# EAGLE board proto2 (EAGLE 6.6.0), part 1 of 3
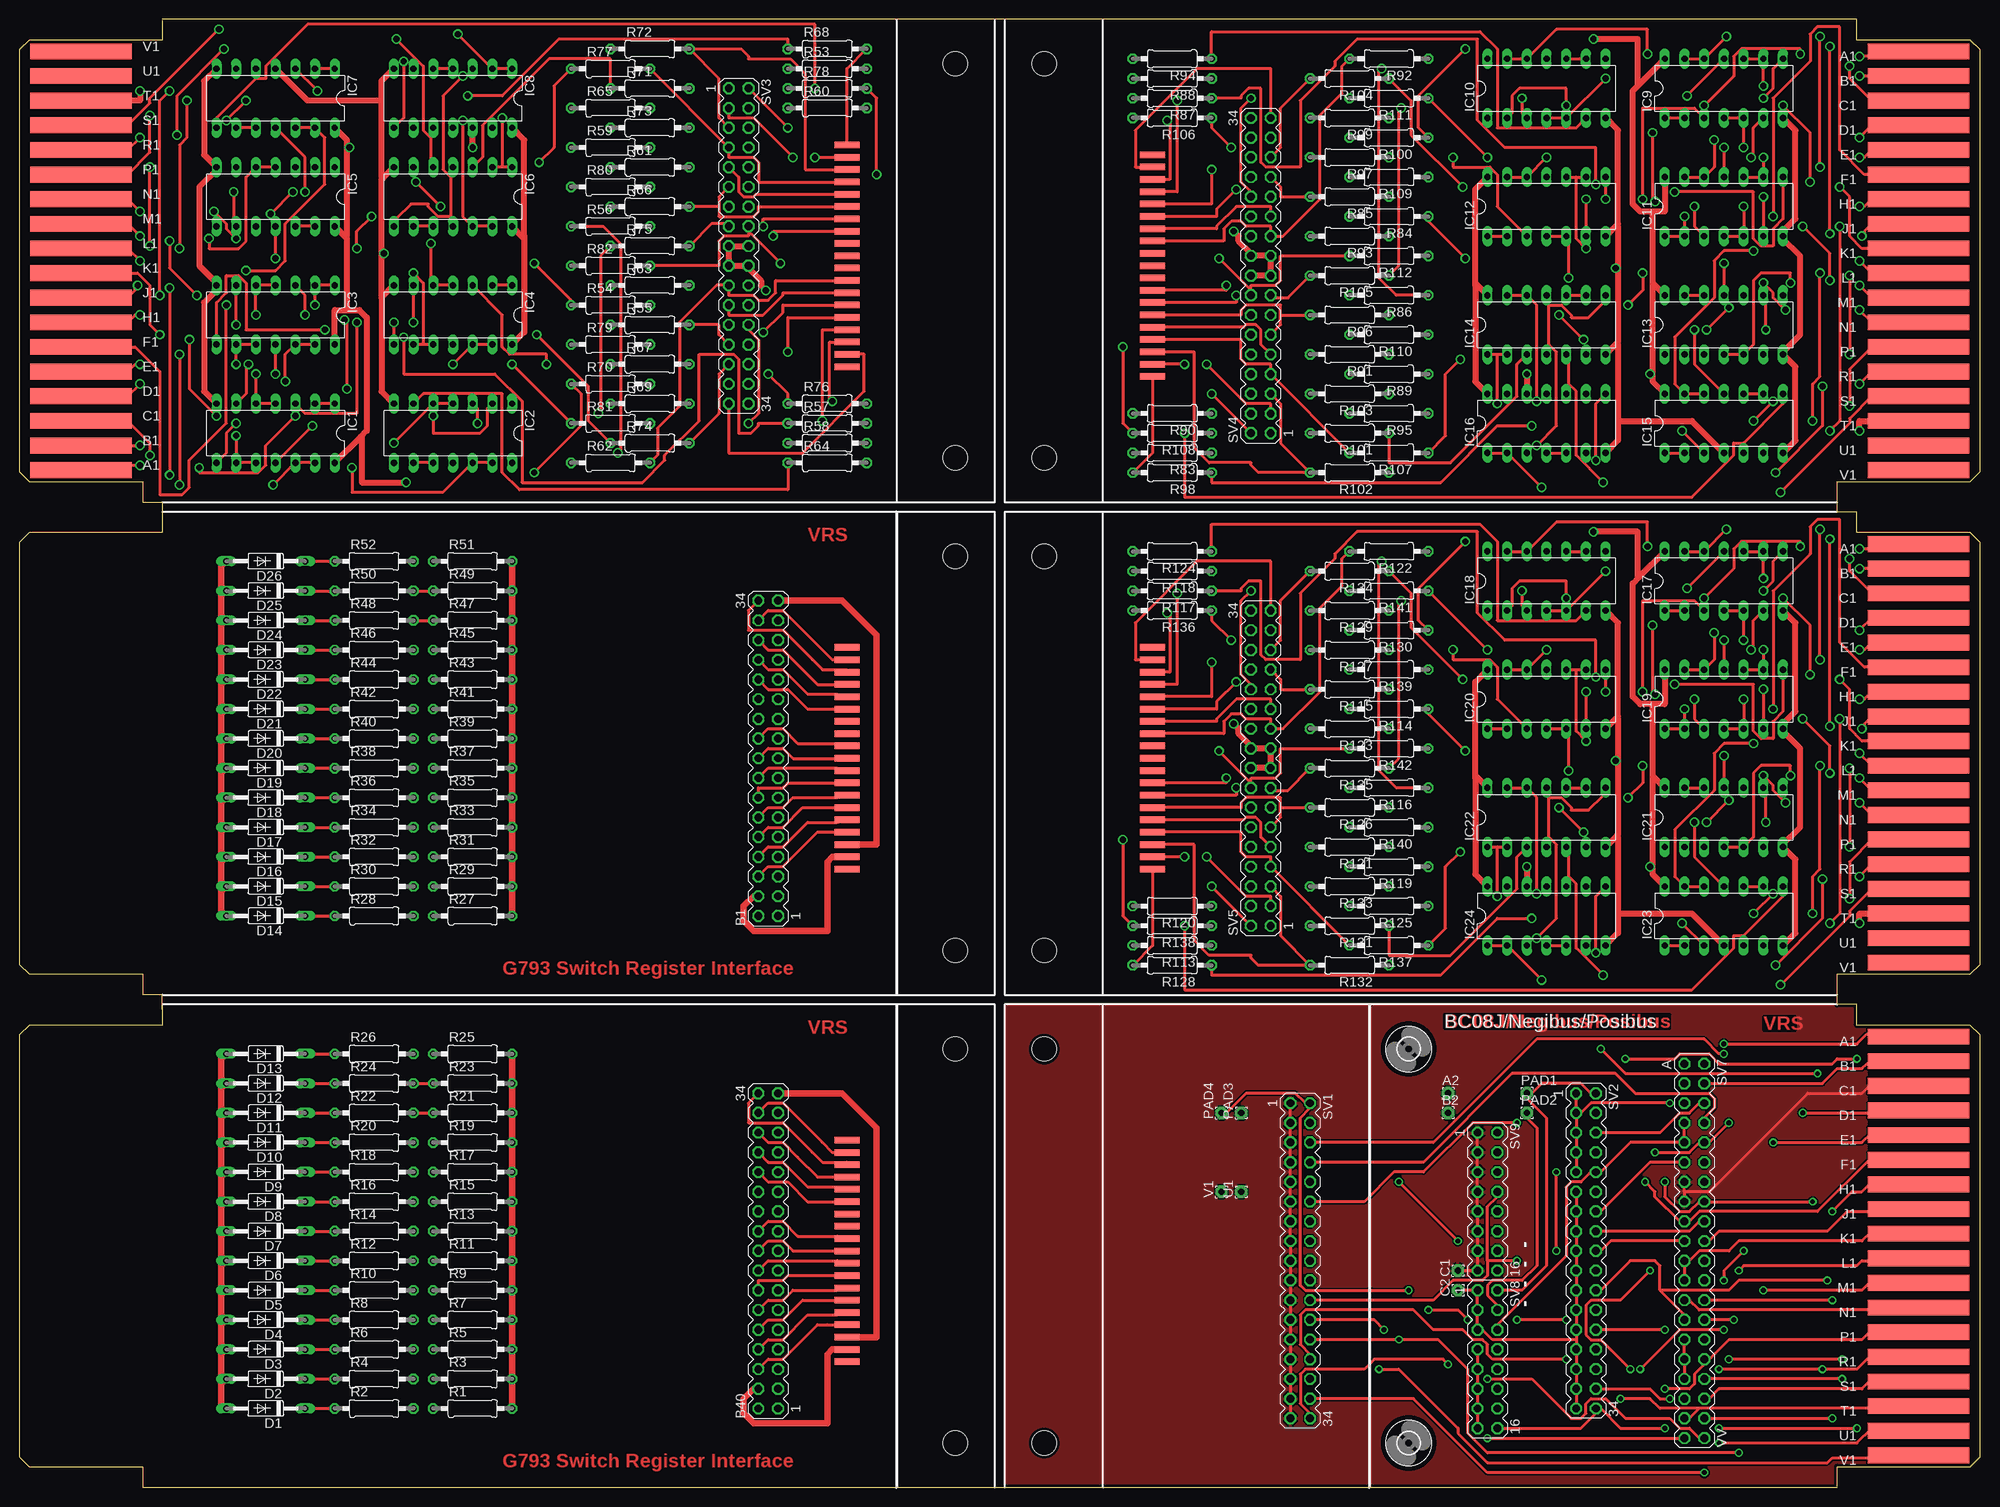
[diagram p0: board, top side]
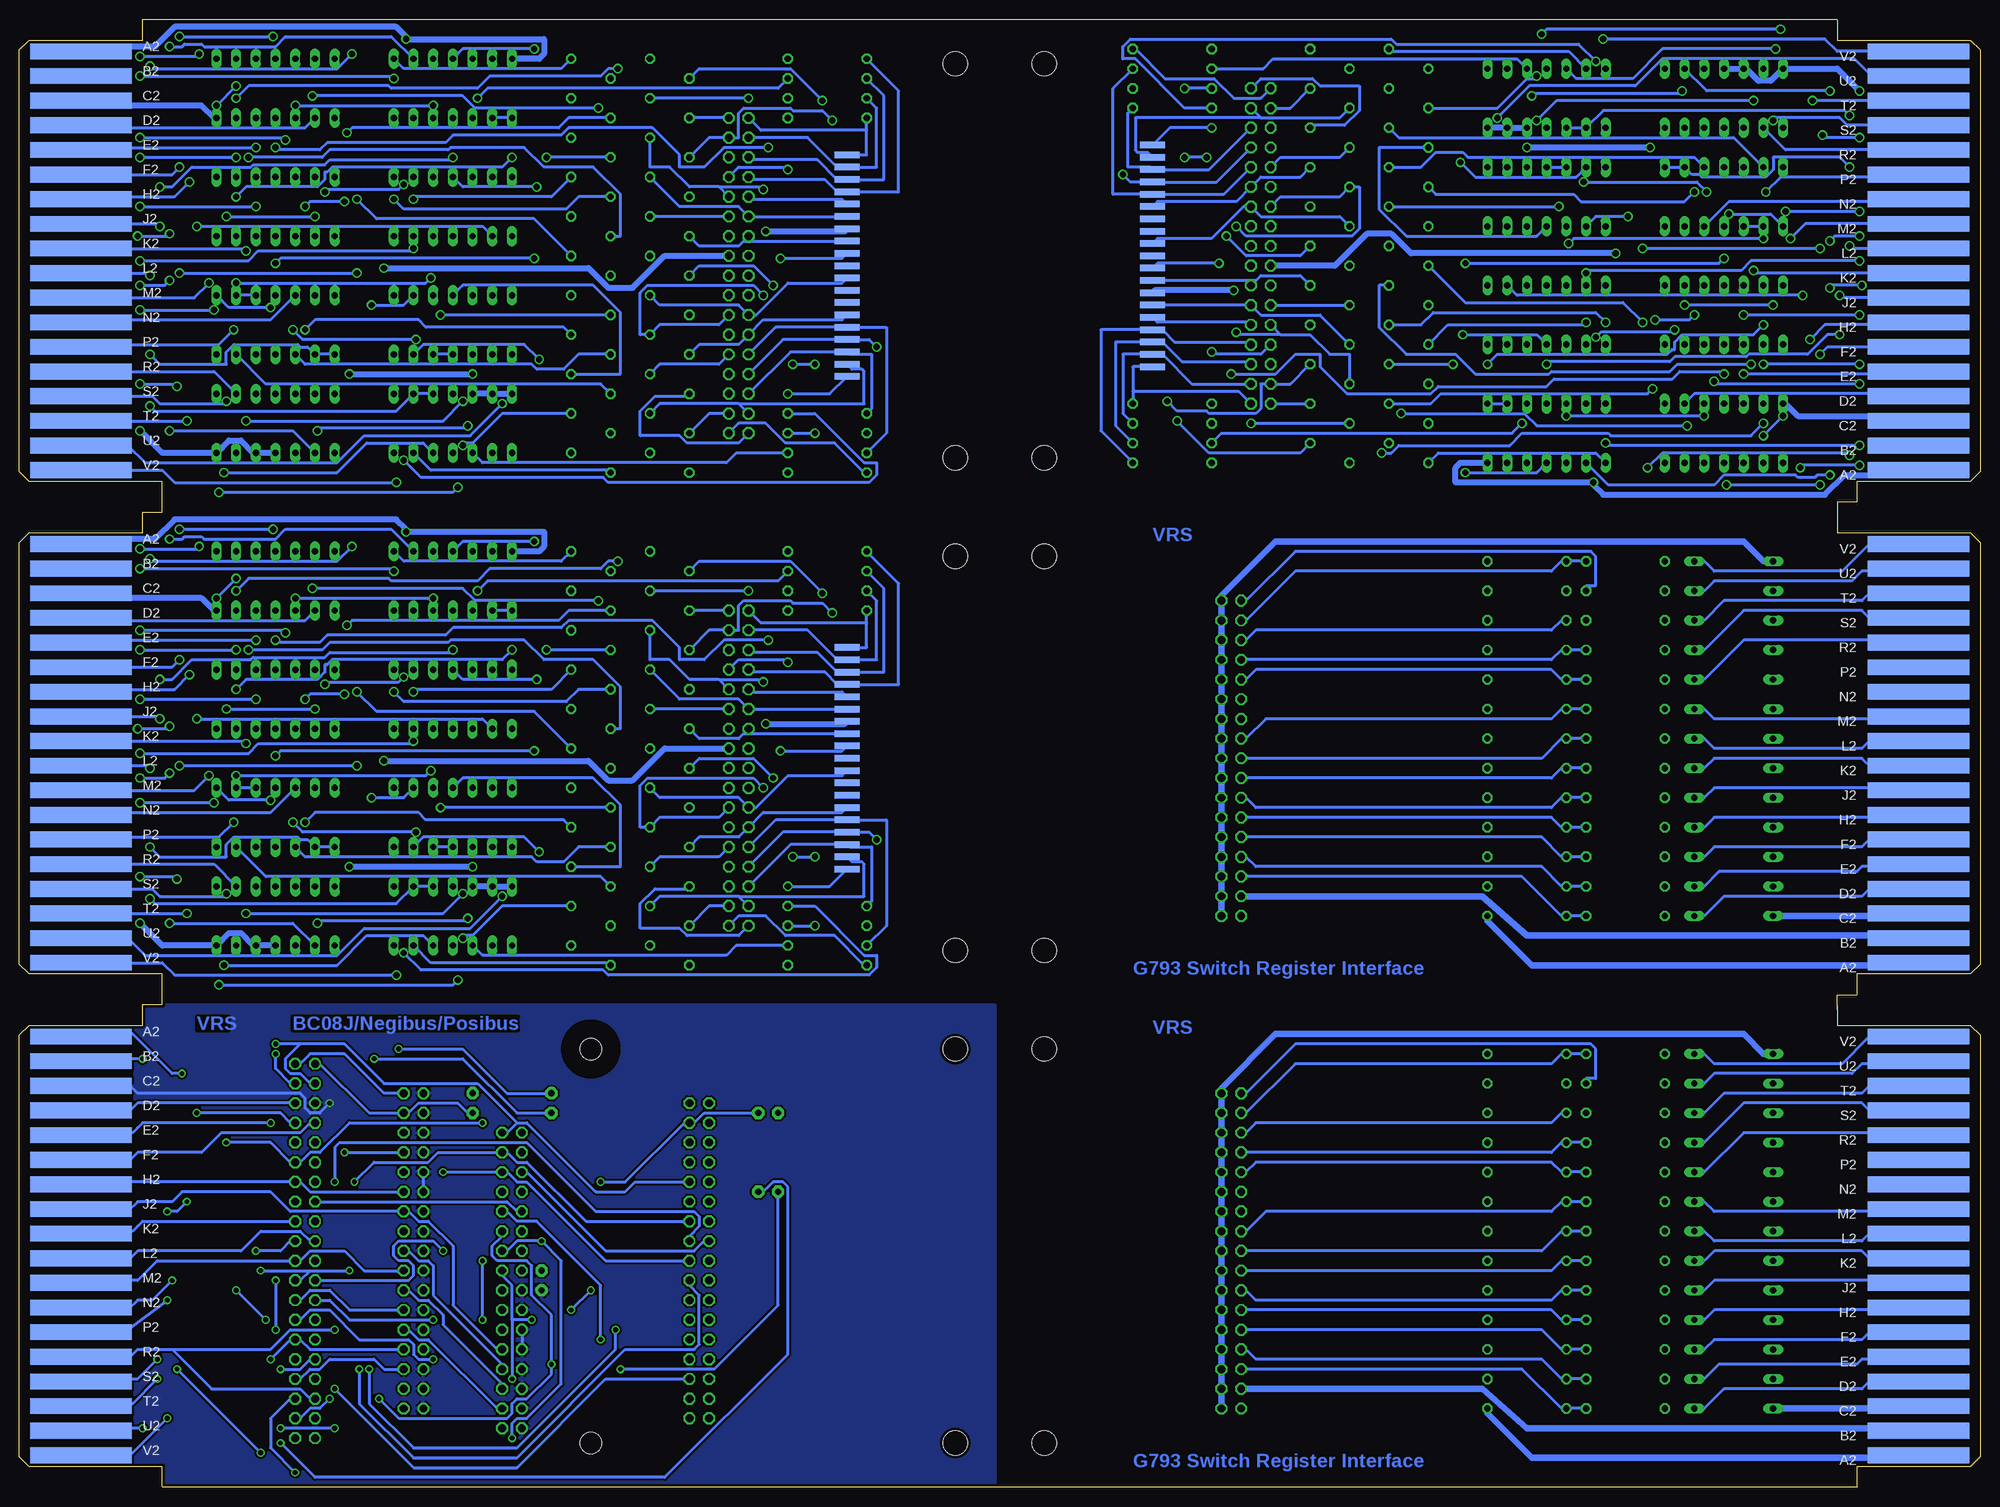
[diagram p1: board, bottom side, seen from below]

Size 252.73 x 189.23 mm. Coordinates in mm from the lower left corner, seen from the top.
Outline: 15.88,0 234.31,0
Outline: 236.85,189.23 18.41,189.23
Outline: 18.41,61.59 18.41,63.5 15.88,63.5
Outline: 15.88,127 18.41,127 18.41,125.09
Outline: 236.85,62.23 234.31,62.23 234.31,64.14
Outline: 236.85,125.73 234.31,125.73 234.31,127.64
Copper layers (1*16): Top 0.035mm / dielectric 1.5mm / Bottom 0.035mm
Design rules "custompcb *": minimum track width 10mil, minimum drill 24mil, track to track 8mil, track to pad 8mil, pad to pad 8mil, via to via 8mil, smd to smd 0mil, copper to edge 15mil, drill to drill 8mil, minimum pad ring 10mil, minimum via ring 8mil, stop-mask expansion 4mil, vias tented up to drill 0mil, thermal gap 10mil
Net classes: 1 supply: width 0.762 mm
Holes 3.17 mm at 120.65,183.51 132.08,183.51 120.65,132.72 132.08,132.72 132.08,120.02 132.08,69.22 132.08,56.52 132.08,5.71 120.65,69.22 120.65,120.02 120.65,5.71 120.65,56.52

## Footprints (pad centres in the part's own frame; a part is rotated, then mirrored left to right if it is on the bottom)
1,6/0,8 = drill 0.813 pad 1.6 octagon: 1 0,0
MA17-2 = drill 1.016 octagon: 1 -20.32,-1.27; 2 -20.32,1.27; 3 -17.78,-1.27; 4 -17.78,1.27; 5 -15.24,-1.27; 6 -15.24,1.27; 7 -12.7,-1.27; 8 -12.7,1.27; 9 -10.16,-1.27; 10 -10.16,1.27; 11 -7.62,-1.27; 12 -7.62,1.27; 13 -5.08,-1.27; 14 -5.08,1.27; 15 -2.54,-1.27; 16 -2.54,1.27; 17 0,-1.27; 18 0,1.27; 19 2.54,-1.27; 20 2.54,1.27; 21 5.08,-1.27; 22 5.08,1.27; 23 7.62,-1.27; 24 7.62,1.27; 25 10.16,-1.27; 26 10.16,1.27; 27 12.7,-1.27; 28 12.7,1.27; 29 15.24,-1.27; 30 15.24,1.27; 31 17.78,-1.27; 32 17.78,1.27; 33 20.32,-1.27; 34 20.32,1.27
FLEX19 = smd 3.175 x 0.838: 1 0,14.287; 2 0,12.7; 3 0,11.113; 4 0,9.525; 5 0,7.938; 6 0,6.35; 7 0,4.763; 8 0,3.175; 9 0,1.587; 10 0,0; 11 0,-1.587; 12 0,-3.175; 13 0,-4.763; 14 0,-6.35; 15 0,-7.938; 16 0,-9.525; 17 0,-11.113; 18 0,-12.7; 19 0,-14.287
DO35-10 = drill 0.813 long: A 5.08,0; C -5.08,0
EDGE-CON2 = smd 13.106 x 2.032: A1 7.938,4.128; B1 7.938,7.303; C1 7.938,10.477; D1 7.938,13.652; E1 7.938,16.828; F1 7.938,20.003; H1 7.938,23.177; J1 7.938,26.352; K1 7.938,29.527; L1 7.938,32.703; M1 7.938,35.877; N1 7.938,39.053; P1 7.938,42.227; R1 7.938,45.403; S1 7.938,48.578; T1 7.938,51.752; U1 7.938,54.928; V1 7.938,58.102 | smd 13.106 x 2.032 bottom: A2 7.938,4.128; B2 7.938,7.303; C2 7.938,10.477; D2 7.938,13.652; E2 7.938,16.828; F2 7.938,20.003; H2 7.938,23.177; J2 7.938,26.352; K2 7.938,29.527; L2 7.938,32.703; M2 7.938,35.877; N2 7.938,39.053; P2 7.938,42.227; R2 7.938,45.403; S2 7.938,48.578; T2 7.938,51.752; U2 7.938,54.928; V2 7.938,58.102
DIL14 = drill 0.813 long: 1 -7.62,-3.81; 2 -5.08,-3.81; 3 -2.54,-3.81; 4 0,-3.81; 5 2.54,-3.81; 6 5.08,-3.81; 7 7.62,-3.81; 8 7.62,3.81; 9 5.08,3.81; 10 2.54,3.81; 11 0,3.81; 12 -2.54,3.81; 13 -5.08,3.81; 14 -7.62,3.81
0207/10 = drill 0.813 octagon: 1 -5.08,0; 2 5.08,0
DEC40PINV = drill 1.016 octagon: A -24.13,-1.27; AA 3.81,-1.27; B -24.13,1.27; BB 3.81,1.27; C -21.59,-1.27; CC 6.35,-1.27; D -21.59,1.27; DD 6.35,1.27; E -19.05,-1.27; EE 8.89,-1.27; F -19.05,1.27; FF 8.89,1.27; H -16.51,-1.27; HH 11.43,-1.27; J -16.51,1.27; JJ 11.43,1.27; K -13.97,-1.27; KK 13.97,-1.27; L -13.97,1.27; LL 13.97,1.27; M -11.43,-1.27; MM 16.51,-1.27; N -11.43,1.27; NN 16.51,1.27; P -8.89,-1.27; PP 19.05,-1.27; R -8.89,1.27; RR 19.05,1.27; S -6.35,-1.27; SS 21.59,-1.27; T -6.35,1.27; TT 21.59,1.27; U -3.81,-1.27; UU 24.13,-1.27; V -3.81,1.27; VV 24.13,1.27; W -1.27,-1.27; X -1.27,1.27; Y 1.27,-1.27; Z 1.27,1.27
MA08-2 = drill 1.016 octagon: 1 -8.89,-1.27; 2 -8.89,1.27; 3 -6.35,-1.27; 4 -6.35,1.27; 5 -3.81,-1.27; 6 -3.81,1.27; 7 -1.27,-1.27; 8 -1.27,1.27; 9 1.27,-1.27; 10 1.27,1.27; 11 3.81,-1.27; 12 3.81,1.27; 13 6.35,-1.27; 14 6.35,1.27; 15 8.89,-1.27; 16 8.89,1.27
EDGE-CON1 = smd 13.106 x 2.032 bottom: A2 7.938,4.128; B2 7.938,7.303; C2 7.938,10.477; D2 7.938,13.652; E2 7.938,16.828; F2 7.938,20.003; H2 7.938,23.177; J2 7.938,26.352; K2 7.938,29.527; L2 7.938,32.703; M2 7.938,35.877; N2 7.938,39.053; P2 7.938,42.227; R2 7.938,45.403; S2 7.938,48.578; T2 7.938,51.752; U2 7.938,54.928; V2 7.938,58.102
2,8 = hole 2.8: 0,0

## Placement (x,y rotation side)
A2  [1,6/0,8]  184.15,50.8 0 top
B1  [MA17-2]  96.52,93.98 90 top
B2  [1,6/0,8]  184.15,48.26 0 top
B40  [MA17-2]  96.52,30.48 90 top
BOT  FLEX19  [FLEX19]  106.68,158.75 0 bottom
BOT1  FLEX19  [FLEX19]  146.05,157.48 180 bottom
BOT2  FLEX19  [FLEX19]  146.05,93.98 180 bottom
C1  [1,6/0,8]  185.42,27.94 90 top
C2  [1,6/0,8]  185.42,25.4 90 top
D1  1N3606  [DO35-10]  31.75,10.16 180 top
D2  1N3606  [DO35-10]  31.75,13.97 180 top
D3  1N3606  [DO35-10]  31.75,17.78 180 top
D4  1N3606  [DO35-10]  31.75,21.59 180 top
D5  1N3606  [DO35-10]  31.75,25.4 180 top
D6  1N3606  [DO35-10]  31.75,29.21 180 top
D7  1N3606  [DO35-10]  31.75,33.02 180 top
D8  1N3606  [DO35-10]  31.75,36.83 180 top
D9  1N3606  [DO35-10]  31.75,40.64 180 top
D10  1N3606  [DO35-10]  31.75,44.45 180 top
D11  1N3606  [DO35-10]  31.75,48.26 180 top
D12  1N3606  [DO35-10]  31.75,52.07 180 top
D13  1N3606  [DO35-10]  31.75,55.88 180 top
D14  1N3606  [DO35-10]  31.75,73.66 180 top
D15  1N3606  [DO35-10]  31.75,77.47 180 top
D16  1N3606  [DO35-10]  31.75,81.28 180 top
D17  1N3606  [DO35-10]  31.75,85.09 180 top
D18  1N3606  [DO35-10]  31.75,88.9 180 top
D19  1N3606  [DO35-10]  31.75,92.71 180 top
D20  1N3606  [DO35-10]  31.75,96.52 180 top
D21  1N3606  [DO35-10]  31.75,100.33 180 top
D22  1N3606  [DO35-10]  31.75,104.14 180 top
D23  1N3606  [DO35-10]  31.75,107.95 180 top
D24  1N3606  [DO35-10]  31.75,111.76 180 top
D25  1N3606  [DO35-10]  31.75,115.57 180 top
D26  1N3606  [DO35-10]  31.75,119.38 180 top
EDGE  [EDGE-CON2]  0,127 0 top
EDGE1  [EDGE-CON2]  252.73,189.23 180 top
EDGE2  [EDGE-CON2]  252.73,125.73 180 top
FLEX1  FLEX19  [FLEX19]  106.68,30.48 180 top
FLEX2  FLEX19  [FLEX19]  106.68,93.98 180 top
IC1  7400N  [DIL14]  33.02,135.89 180 top
IC2  7400N  [DIL14]  55.88,135.89 180 top
IC3  7400N  [DIL14]  33.02,151.13 180 top
IC4  7400N  [DIL14]  55.88,151.13 180 top
IC5  7400N  [DIL14]  33.02,166.37 180 top
IC6  7400N  [DIL14]  55.88,166.37 180 top
IC7  7400N  [DIL14]  33.02,179.07 180 top
IC8  7400N  [DIL14]  55.88,179.07 180 top
IC9  7400N  [DIL14]  219.71,180.34 0 top
IC10  7400N  [DIL14]  196.85,180.34 0 top
IC11  7400N  [DIL14]  219.71,165.1 0 top
IC12  7400N  [DIL14]  196.85,165.1 0 top
IC13  7400N  [DIL14]  219.71,149.86 0 top
IC14  7400N  [DIL14]  196.85,149.86 0 top
IC15  7400N  [DIL14]  219.71,137.16 0 top
IC16  7400N  [DIL14]  196.85,137.16 0 top
IC17  7400N  [DIL14]  219.71,116.84 0 top
IC18  7400N  [DIL14]  196.85,116.84 0 top
IC19  7400N  [DIL14]  219.71,101.6 0 top
IC20  7400N  [DIL14]  196.85,101.6 0 top
IC21  7400N  [DIL14]  219.71,86.36 0 top
IC22  7400N  [DIL14]  196.85,86.36 0 top
IC23  7400N  [DIL14]  219.71,73.66 0 top
IC24  7400N  [DIL14]  196.85,73.66 0 top
PAD1  [1,6/0,8]  194.31,50.8 0 top
PAD2  [1,6/0,8]  194.31,48.26 0 top
PAD3  [1,6/0,8]  157.48,48.26 90 top
PAD4  [1,6/0,8]  154.94,48.26 90 top
R1  1.5K  [0207/10]  58.42,10.16 0 top
R2  1.5K  [0207/10]  45.72,10.16 0 top
R3  1.5K  [0207/10]  58.42,13.97 0 top
R4  1.5K  [0207/10]  45.72,13.97 0 top
R5  1.5K  [0207/10]  58.42,17.78 0 top
R6  1.5K  [0207/10]  45.72,17.78 0 top
R7  1.5K  [0207/10]  58.42,21.59 0 top
R8  1.5K  [0207/10]  45.72,21.59 0 top
R9  1.5K  [0207/10]  58.42,25.4 0 top
R10  1.5K  [0207/10]  45.72,25.4 0 top
R11  1.5K  [0207/10]  58.42,29.21 0 top
R12  1.5K  [0207/10]  45.72,29.21 0 top
R13  1.5K  [0207/10]  58.42,33.02 0 top
R14  1.5K  [0207/10]  45.72,33.02 0 top
R15  1.5K  [0207/10]  58.42,36.83 0 top
R16  1.5K  [0207/10]  45.72,36.83 0 top
R17  1.5K  [0207/10]  58.42,40.64 0 top
R18  1.5K  [0207/10]  45.72,40.64 0 top
R19  1.5K  [0207/10]  58.42,44.45 0 top
R20  1.5K  [0207/10]  45.72,44.45 0 top
R21  1.5K  [0207/10]  58.42,48.26 0 top
R22  1.5K  [0207/10]  45.72,48.26 0 top
R23  1.5K  [0207/10]  58.42,52.07 0 top
R24  1.5K  [0207/10]  45.72,52.07 0 top
R25  1.5K  [0207/10]  58.42,55.88 0 top
R26  1.5K  [0207/10]  45.72,55.88 0 top
R27  1.5K  [0207/10]  58.42,73.66 0 top
R28  1.5K  [0207/10]  45.72,73.66 0 top
R29  1.5K  [0207/10]  58.42,77.47 0 top
R30  1.5K  [0207/10]  45.72,77.47 0 top
R31  1.5K  [0207/10]  58.42,81.28 0 top
R32  1.5K  [0207/10]  45.72,81.28 0 top
R33  1.5K  [0207/10]  58.42,85.09 0 top
R34  1.5K  [0207/10]  45.72,85.09 0 top
R35  1.5K  [0207/10]  58.42,88.9 0 top
R36  1.5K  [0207/10]  45.72,88.9 0 top
R37  1.5K  [0207/10]  58.42,92.71 0 top
R38  1.5K  [0207/10]  45.72,92.71 0 top
R39  1.5K  [0207/10]  58.42,96.52 0 top
R40  1.5K  [0207/10]  45.72,96.52 0 top
R41  1.5K  [0207/10]  58.42,100.33 0 top
R42  1.5K  [0207/10]  45.72,100.33 0 top
R43  1.5K  [0207/10]  58.42,104.14 0 top
R44  1.5K  [0207/10]  45.72,104.14 0 top
R45  1.5K  [0207/10]  58.42,107.95 0 top
R46  1.5K  [0207/10]  45.72,107.95 0 top
R47  1.5K  [0207/10]  58.42,111.76 0 top
R48  1.5K  [0207/10]  45.72,111.76 0 top
R49  1.5K  [0207/10]  58.42,115.57 0 top
R50  1.5K  [0207/10]  45.72,115.57 0 top
R51  1.5K  [0207/10]  58.42,119.38 0 top
R52  1.5K  [0207/10]  45.72,119.38 0 top
R53  470  [0207/10]  104.14,182.88 0 top
R54  470  [0207/10]  76.2,152.4 0 top
R55  470  [0207/10]  81.28,149.86 0 top
R56  470  [0207/10]  76.2,162.56 0 top
R57  470  [0207/10]  104.14,137.16 0 top
R58  470  [0207/10]  104.14,134.62 0 top
R59  470  [0207/10]  76.2,172.72 0 top
R60  470  [0207/10]  104.14,177.8 0 top
R61  470  [0207/10]  81.28,170.18 0 top
R62  470  [0207/10]  76.2,132.08 0 top
R63  470  [0207/10]  81.28,154.94 0 top
R64  470  [0207/10]  104.14,132.08 0 top
R65  470  [0207/10]  76.2,177.8 0 top
R66  470  [0207/10]  81.28,165.1 0 top
R67  470  [0207/10]  81.28,144.78 0 top
R68  470  [0207/10]  104.14,185.42 0 top
R69  470  [0207/10]  81.28,139.7 0 top
R70  470  [0207/10]  76.2,142.24 0 top
R71  470  [0207/10]  81.28,180.34 0 top
R72  470  [0207/10]  81.28,185.42 0 top
R73  470  [0207/10]  81.28,175.26 0 top
R74  470  [0207/10]  81.28,134.62 0 top
R75  470  [0207/10]  81.28,160.02 0 top
R76  470  [0207/10]  104.14,139.7 0 top
R77  470  [0207/10]  76.2,182.88 0 top
R78  470  [0207/10]  104.14,180.34 0 top
R79  470  [0207/10]  76.2,147.32 0 top
R80  470  [0207/10]  76.2,167.64 0 top
R81  470  [0207/10]  76.2,137.16 0 top
R82  470  [0207/10]  76.2,157.48 0 top
R83  470  [0207/10]  148.59,133.35 180 top
R84  470  [0207/10]  176.53,163.83 180 top
R85  470  [0207/10]  171.45,166.37 180 top
R86  470  [0207/10]  176.53,153.67 180 top
R87  470  [0207/10]  148.59,179.07 180 top
R88  470  [0207/10]  148.59,181.61 180 top
R89  470  [0207/10]  176.53,143.51 180 top
R90  470  [0207/10]  148.59,138.43 180 top
R91  470  [0207/10]  171.45,146.05 180 top
R92  470  [0207/10]  176.53,184.15 180 top
R93  470  [0207/10]  171.45,161.29 180 top
R94  470  [0207/10]  148.59,184.15 180 top
R95  470  [0207/10]  176.53,138.43 180 top
R96  470  [0207/10]  171.45,151.13 180 top
R97  470  [0207/10]  171.45,171.45 180 top
R98  470  [0207/10]  148.59,130.81 180 top
R99  470  [0207/10]  171.45,176.53 180 top
R100  470  [0207/10]  176.53,173.99 180 top
R101  470  [0207/10]  171.45,135.89 180 top
R102  470  [0207/10]  171.45,130.81 180 top
R103  470  [0207/10]  171.45,140.97 180 top
R104  470  [0207/10]  171.45,181.61 180 top
R105  470  [0207/10]  171.45,156.21 180 top
R106  470  [0207/10]  148.59,176.53 180 top
R107  470  [0207/10]  176.53,133.35 180 top
R108  470  [0207/10]  148.59,135.89 180 top
R109  470  [0207/10]  176.53,168.91 180 top
R110  470  [0207/10]  176.53,148.59 180 top
R111  470  [0207/10]  176.53,179.07 180 top
R112  470  [0207/10]  176.53,158.75 180 top
R113  470  [0207/10]  148.59,69.85 180 top
R114  470  [0207/10]  176.53,100.33 180 top
R115  470  [0207/10]  171.45,102.87 180 top
R116  470  [0207/10]  176.53,90.17 180 top
R117  470  [0207/10]  148.59,115.57 180 top
R118  470  [0207/10]  148.59,118.11 180 top
R119  470  [0207/10]  176.53,80.01 180 top
R120  470  [0207/10]  148.59,74.93 180 top
R121  470  [0207/10]  171.45,82.55 180 top
R122  470  [0207/10]  176.53,120.65 180 top
R123  470  [0207/10]  171.45,97.79 180 top
R124  470  [0207/10]  148.59,120.65 180 top
R125  470  [0207/10]  176.53,74.93 180 top
R126  470  [0207/10]  171.45,87.63 180 top
R127  470  [0207/10]  171.45,107.95 180 top
R128  470  [0207/10]  148.59,67.31 180 top
R129  470  [0207/10]  171.45,113.03 180 top
R130  470  [0207/10]  176.53,110.49 180 top
R131  470  [0207/10]  171.45,72.39 180 top
R132  470  [0207/10]  171.45,67.31 180 top
R133  470  [0207/10]  171.45,77.47 180 top
R134  470  [0207/10]  171.45,118.11 180 top
R135  470  [0207/10]  171.45,92.71 180 top
R136  470  [0207/10]  148.59,113.03 180 top
R137  470  [0207/10]  176.53,69.85 180 top
R138  470  [0207/10]  148.59,72.39 180 top
R139  470  [0207/10]  176.53,105.41 180 top
R140  470  [0207/10]  176.53,85.09 180 top
R141  470  [0207/10]  176.53,115.57 180 top
R142  470  [0207/10]  176.53,95.25 180 top
SV1  [MA17-2]  165.1,29.21 270 top
SV2  [MA17-2]  201.93,30.48 270 top
SV3  [MA17-2]  92.71,160.02 270 top
SV4  [MA17-2]  160.02,156.21 90 top
SV5  [MA17-2]  160.02,92.71 90 top
SV7  [DEC40PINV]  215.9,30.48 270 top
SV8  [MA08-2]  189.23,16.51 270 top
SV9  [MA08-2]  189.23,36.83 270 top
TOP  FLEX19  [FLEX19]  106.68,158.75 0 top
TOP1  FLEX19  [FLEX19]  146.05,157.48 180 top
TOP2  FLEX19  [FLEX19]  146.05,93.98 180 top
U1  [1,6/0,8]  157.48,38.1 90 top
U$2  EDGE-1  [EDGE-CON1]  0,0 0 top
U$7  EDGE-1  [EDGE-CON1]  0,63.5 0 top
U$9  [EDGE-CON2]  252.73,62.23 180 top
U$11  [2,8]  179.07,56.52 0 top
U$12  [2,8]  179.07,5.71 0 top
V1  [1,6/0,8]  154.94,38.1 90 top

## Library data of the parts
A2 B2 C1 C2 PAD1-PAD4 U1 V1 = wirepad
B1 B40 SV3-SV5 = con-lstb; OC_FARNELL: unknown; OC_NEWARK: unknown
BOT BOT1 BOT2 EDGE EDGE1 EDGE2 FLEX1 FLEX2 SV7 TOP TOP1 TOP2 U$2 U$7 U$9 = dec-con
D1-D26 = diode
IC1-IC24 = 74xx-us
R1-R142 = rcl
SV1 SV2 SV8 SV9 = con-lstb
U$11 U$12 = holes

## Nets
-15V [supply]: B40.4 FLEX1.2 U$2.B2
-15V1 [supply]: B1.4 FLEX2.2 U$7.B2
-15V2: B2.1 U$9.B2
A1: SV1.10 SV7.C SV9.2 U$9.A1
B1: SV1.6 SV7.D U$9.B1
BOT1: BOT.1 R73.2 SV3.2
BOT2: BOT.2 R65.2 SV3.4
BOT3: BOT.3 R60.2 SV3.6
BOT4: BOT.4 R78.2 SV3.8
BOT5: BOT.5 R53.2 SV3.10
BOT6: BOT.6 R61.2 SV3.12
BOT7: BOT1.15 R111.2 SV4.26
BOT8: BOT1.3 R90.2 SV4.6
BOT9: BOT.9 R56.2 SV3.14
BOT10: BOT1.1 R103.2 SV4.2
BOT11: BOT.11 R82.2 SV3.16
BOT12: BOT.12 R63.2 SV3.22
BOT13: BOT1.2 R95.2 SV4.4
BOT14: BOT.14 R79.2 SV3.24
BOT15: BOT.15 R81.2 SV3.26
BOT16: BOT.16 R64.2 SV3.28
BOT17: BOT.17 R58.2 SV3.30
BOT18: BOT.18 R57.2 SV3.32
BOT19: BOT.19 R76.2 SV3.34
BOT20: BOT1.4 R108.2 SV4.8
BOT21: BOT1.5 R83.2 SV4.10
BOT22: BOT1.19 R106.2 SV4.34
BOT23: BOT1.18 R87.2 SV4.32
BOT24: BOT1.17 R88.2 SV4.30
BOT25: BOT1.16 R94.2 SV4.28
BOT26: BOT1.14 R109.2 SV4.24
BOT27: BOT1.12 R93.2 SV4.22
BOT28: BOT1.11 R112.2 SV4.16
BOT29: BOT1.9 R86.2 SV4.14
BOT30: BOT1.6 R91.2 SV4.12
BOT31: BOT2.15 R141.2 SV5.26
BOT32: BOT2.3 R120.2 SV5.6
BOT33: BOT2.1 R133.2 SV5.2
BOT34: BOT2.2 R125.2 SV5.4
BOT35: BOT2.4 R138.2 SV5.8
BOT36: BOT2.5 R113.2 SV5.10
BOT37: BOT2.19 R136.2 SV5.34
BOT38: BOT2.18 R117.2 SV5.32
BOT39: BOT2.17 R118.2 SV5.30
BOT40: BOT2.16 R124.2 SV5.28
BOT41: BOT2.14 R139.2 SV5.24
BOT42: BOT2.12 R123.2 SV5.22
BOT43: BOT2.11 R142.2 SV5.16
BOT44: BOT2.9 R116.2 SV5.14
BOT45: BOT2.6 R121.2 SV5.12
C1: C1.1 SV1.1 SV1.3 SV1.5 SV1.7 SV1.9 SV1.11 SV1.13 SV1.15 SV1.17 SV1.19 SV1.21 SV1.23 SV1.25 SV1.27 SV1.29 SV1.31 SV1.33 SV7.P SV7.S SV9.1 SV9.3 SV9.5 SV9.7 SV9.9 SV9.11 SV9.13 SV9.15 U$9.C1
C2: C2.1 SV2.1 SV2.3 SV2.5 SV2.7 SV2.9 SV2.11 SV2.13 SV2.15 SV2.17 SV2.19 SV2.21 SV2.23 SV2.25 SV2.27 SV2.29 SV2.31 SV2.33 SV7.E SV8.1 SV8.3 SV8.5 SV8.7 SV8.9 SV8.11 SV8.13 SV8.15 U$9.C2
D1: D14.C R28.1 U$7.D2
D2: D1.C R2.1 U$2.D2
D3: SV2.6 SV7.F U$9.D2
D4: SV1.8 SV7.J U$9.D1
E1: D15.C R30.1 U$7.E2
E2: D2.C R4.1 U$2.E2
E3: SV2.8 SV7.L U$9.E2
E4: SV1.12 SV7.N U$9.E1
F1: D16.C R32.1 U$7.F2
F2: D3.C R6.1 U$2.F2
F3: SV2.10 SV7.H SV7.K SV8.6 U$9.F2
F4: SV1.14 SV7.U SV9.4 U$9.F1
GND2 [supply]: BOT.13 EDGE.C2 EDGE.T1 IC1.7 IC2.7 IC3.7 IC4.7 IC5.7 IC6.7 IC7.4 IC7.5 IC7.7 IC8.7 SV3.17 SV3.18 SV3.19 SV3.20
GND3 [supply]: BOT1.13 EDGE1.C2 EDGE1.T1 IC9.7 IC10.7 IC11.7 IC12.7 IC13.7 IC14.7 IC15.4 IC15.5 IC15.7 IC16.7 SV4.17 SV4.18 SV4.19 SV4.20
GND4 [supply]: BOT2.13 EDGE2.C2 EDGE2.T1 IC17.7 IC18.7 IC19.7 IC20.7 IC21.7 IC22.7 IC23.4 IC23.5 IC23.7 IC24.7 SV5.17 SV5.18 SV5.19 SV5.20
GND5 [supply]: B40.1 B40.3 B40.5 B40.7 B40.9 B40.11 B40.13 B40.15 B40.17 B40.19 B40.21 B40.23 B40.25 B40.27 B40.29 B40.31 B40.33 D1.A D2.A D3.A D4.A D5.A D6.A D7.A D8.A D9.A D10.A D11.A D12.A D13.A FLEX1.3 U$2.C2
GND6 [supply]: B1.1 B1.3 B1.5 B1.7 B1.9 B1.11 B1.13 B1.15 B1.17 B1.19 B1.21 B1.23 B1.25 B1.27 B1.29 B1.31 B1.33 D14.A D15.A D16.A D17.A D18.A D19.A D20.A D21.A D22.A D23.A D24.A D25.A D26.A FLEX2.3 U$7.C2
H1: D17.C R34.1 U$7.H2
H2: D4.C R8.1 U$2.H2
H3: SV2.12 SV7.R U$9.H2
H4: SV1.16 SV7.T U$9.H1
J1: D18.C R36.1 U$7.J2
J2: D5.C R10.1 U$2.J2
J3: SV1.20 SV7.X U$9.J1
J4: SV2.14 SV7.M SV8.8 U$9.J2
JA2: PAD1.1 SV2.2 SV7.B SV8.2
JB2: PAD2.1 SV2.4 SV7.A SV8.4
JU1: PAD3.1 SV1.4 SV7.UU SV9.14
JV1: PAD4.1 SV1.2 SV7.VV SV9.16
K1: D19.C R38.1 U$7.K2
K2: D6.C R12.1 U$2.K2
K3: SV2.16 SV7.V U$9.K2
K4: SV1.18 SV7.AA SV7.Y SV9.6 U$9.K1
L1: D20.C R40.1 U$7.L2
L2: D7.C R14.1 U$2.L2
L3: SV1.24 SV7.BB U$9.L1
L4: SV2.18 SV7.W SV8.10 U$9.L2
M1: D21.C R42.1 U$7.M2
M2: D8.C R16.1 U$2.M2
M3: SV2.20 SV7.Z U$9.M2
M4: SV1.28 SV7.FF U$9.M1
N1: SV1.22 SV7.CC SV9.8 U$9.N1
N2: SV2.22 SV7.EE SV8.12 U$9.N2
N$1: EDGE.A1 IC2.1 IC2.2
N$2: IC2.3 R58.1
N$3: IC3.8 R57.1
N$4: IC1.8 R56.1
N$5: IC4.8 R55.1
N$6: IC5.11 R54.1
N$7: EDGE.H2 IC1.9 IC1.10
N$8: EDGE.S1 IC8.1 IC8.2
N$9: EDGE.N2 IC5.12 IC5.13
N$10: EDGE.L1 IC4.9 IC4.10
N$11: EDGE.E1 IC3.9 IC3.10
N$12: EDGE.P1 IC8.9 IC8.10
N$13: EDGE.B1 IC2.4 IC2.5
N$14: EDGE.E2 IC1.4 IC1.5
N$15: EDGE.J1 IC2.9 IC2.10
N$16: EDGE.L2 IC5.1 IC5.2
N$17: EDGE.S2 IC6.12 IC6.13
N$18: IC8.8 R60.1
N$19: IC5.3 R61.1
N$20: IC2.8 R62.1
N$21: IC1.6 R63.1
N$22: IC2.6 R64.1
N$23: IC6.11 R59.1
N$24: IC8.3 R53.1
N$25: EDGE.P2 IC5.9 IC5.10
N$26: EDGE.C1 IC2.12 IC2.13
N$27: EDGE.F1 IC3.1 IC3.2
N$28: EDGE.J2 IC7.1 IC7.2
N$29: EDGE.M1 IC4.1 IC4.2
N$30: EDGE.T2 IC6.9 IC6.10
N$31: IC6.8 R65.1
N$32: IC5.8 R66.1
N$33: IC4.3 R67.1
N$34: IC7.3 R68.1
N$35: IC2.11 R70.1
N$36: IC3.3 R69.1
N$37: IC6.3 R71.1
N$38: IC8.6 R72.1
N$39: IC5.6 R73.1
N$40: IC4.11 R74.1
N$41: IC1.11 R75.1
N$42: IC3.11 R76.1
N$43: EDGE.R1 IC8.4 IC8.5
N$44: EDGE.F2 IC1.12 IC1.13
N$45: EDGE.K1 IC4.12 IC4.13
N$46: EDGE.M2 IC5.4 IC5.5
N$47: EDGE.U2 IC6.1 IC6.2
N$48: EDGE.R2 IC7.9 IC7.10
N$49: EDGE.D1 IC3.12 IC3.13
N$50: EDGE.D2 IC1.1 IC1.2
N$51: EDGE.H1 IC3.4 IC3.5
N$52: EDGE.K2 IC7.12 IC7.13
N$53: EDGE.N1 IC4.4 IC4.5
N$54: EDGE.V2 IC6.4 IC6.5
N$55: IC6.6 R77.1
N$56: IC7.8 R78.1
N$57: IC4.6 R79.1
N$58: IC7.11 R80.1
N$59: IC3.6 R81.1
N$60: IC1.3 R82.1
N$61: EDGE1.A1 IC10.1 IC10.2
N$62: IC10.3 R88.1
N$63: IC11.8 R87.1
N$64: IC9.8 R86.1
N$65: IC12.8 R85.1
N$66: IC13.11 R84.1
N$67: EDGE1.H2 IC9.9 IC9.10
N$68: EDGE1.S1 IC16.1 IC16.2
N$69: EDGE1.N2 IC13.12 IC13.13
N$70: EDGE1.L1 IC12.9 IC12.10
N$71: EDGE1.E1 IC11.9 IC11.10
N$72: EDGE1.P1 IC16.9 IC16.10
N$73: EDGE1.B1 IC10.4 IC10.5
N$74: EDGE1.E2 IC9.4 IC9.5
N$75: EDGE1.J1 IC10.9 IC10.10
N$76: EDGE1.L2 IC13.1 IC13.2
N$77: EDGE1.S2 IC14.12 IC14.13
N$78: IC16.8 R90.1
N$79: IC13.3 R91.1
N$80: IC10.8 R92.1
N$81: IC9.6 R93.1
N$82: IC10.6 R94.1
N$83: IC14.11 R89.1
N$84: IC16.3 R83.1
N$85: EDGE1.P2 IC13.9 IC13.10
N$86: EDGE1.C1 IC10.12 IC10.13
N$87: EDGE1.F1 IC11.1 IC11.2
N$88: EDGE1.J2 IC15.1 IC15.2
N$89: EDGE1.M1 IC12.1 IC12.2
N$90: EDGE1.T2 IC14.9 IC14.10
N$91: IC14.8 R95.1
N$92: IC13.8 R96.1
N$93: IC12.3 R97.1
N$94: IC15.3 R98.1
N$95: IC10.11 R100.1
N$96: IC11.3 R99.1
N$97: IC14.3 R101.1
N$98: IC16.6 R102.1
N$99: IC13.6 R103.1
N$100: IC12.11 R104.1
N$101: IC9.11 R105.1
N$102: IC11.11 R106.1
N$103: EDGE1.R1 IC16.4 IC16.5
N$104: EDGE1.F2 IC9.12 IC9.13
N$105: EDGE1.K1 IC12.12 IC12.13
N$106: EDGE1.M2 IC13.4 IC13.5
N$107: EDGE1.U2 IC14.1 IC14.2
N$108: EDGE1.R2 IC15.9 IC15.10
N$109: EDGE1.D1 IC11.12 IC11.13
N$110: EDGE1.D2 IC9.1 IC9.2
N$111: EDGE1.H1 IC11.4 IC11.5
N$112: EDGE1.K2 IC15.12 IC15.13
N$113: EDGE1.N1 IC12.4 IC12.5
N$114: EDGE1.V2 IC14.4 IC14.5
N$115: IC14.6 R107.1
N$116: IC15.8 R108.1
N$117: IC12.6 R109.1
N$118: IC15.11 R110.1
N$119: IC11.6 R111.1
N$120: IC9.3 R112.1
N$121: EDGE2.A1 IC18.1 IC18.2
N$122: IC18.3 R118.1
N$123: IC19.8 R117.1
N$124: IC17.8 R116.1
N$125: IC20.8 R115.1
N$126: IC21.11 R114.1
N$127: EDGE2.H2 IC17.9 IC17.10
N$128: EDGE2.S1 IC24.1 IC24.2
N$129: EDGE2.N2 IC21.12 IC21.13
N$130: EDGE2.L1 IC20.9 IC20.10
N$131: EDGE2.E1 IC19.9 IC19.10
N$132: EDGE2.P1 IC24.9 IC24.10
N$133: EDGE2.B1 IC18.4 IC18.5
N$134: EDGE2.E2 IC17.4 IC17.5
N$135: EDGE2.J1 IC18.9 IC18.10
N$136: EDGE2.L2 IC21.1 IC21.2
N$137: EDGE2.S2 IC22.12 IC22.13
N$138: IC24.8 R120.1
N$139: IC21.3 R121.1
N$140: IC18.8 R122.1
N$141: IC17.6 R123.1
N$142: IC18.6 R124.1
N$143: IC22.11 R119.1
N$144: IC24.3 R113.1
N$145: EDGE2.P2 IC21.9 IC21.10
N$146: EDGE2.C1 IC18.12 IC18.13
N$147: EDGE2.F1 IC19.1 IC19.2
N$148: EDGE2.J2 IC23.1 IC23.2
N$149: EDGE2.M1 IC20.1 IC20.2
N$150: EDGE2.T2 IC22.9 IC22.10
N$151: IC22.8 R125.1
N$152: IC21.8 R126.1
N$153: IC20.3 R127.1
N$154: IC23.3 R128.1
N$155: IC18.11 R130.1
N$156: IC19.3 R129.1
N$157: IC22.3 R131.1
N$158: IC24.6 R132.1
N$159: IC21.6 R133.1
N$160: IC20.11 R134.1
N$161: IC17.11 R135.1
N$162: IC19.11 R136.1
N$163: EDGE2.R1 IC24.4 IC24.5
N$164: EDGE2.F2 IC17.12 IC17.13
N$165: EDGE2.K1 IC20.12 IC20.13
N$166: EDGE2.M2 IC21.4 IC21.5
N$167: EDGE2.U2 IC22.1 IC22.2
N$168: EDGE2.R2 IC23.9 IC23.10
N$169: EDGE2.D1 IC19.12 IC19.13
N$170: EDGE2.D2 IC17.1 IC17.2
N$171: EDGE2.H1 IC19.4 IC19.5
N$172: EDGE2.K2 IC23.12 IC23.13
N$173: EDGE2.N1 IC20.4 IC20.5
N$174: EDGE2.V2 IC22.4 IC22.5
N$175: IC22.6 R137.1
N$176: IC23.8 R138.1
N$177: IC20.6 R139.1
N$178: IC23.11 R140.1
N$179: IC19.6 R141.1
N$180: IC17.3 R142.1
P1: SV1.30 SV7.LL U$9.P1
P2: SV2.24 SV7.DD U$9.P2
R1: D22.C R44.1 U$7.R2
R2: D9.C R18.1 U$2.R2
R3: SV2.26 SV7.PP SV8.14 U$9.R2
R4: SV1.26 SV7.HH SV7.KK SV7.MM SV9.10 U$9.R1
S1: D23.C R46.1 U$7.S2
S2: D10.C R20.1 U$2.S2
S3: SV2.28 SV7.JJ U$9.S2
S4: SV1.32 SV7.RR U$9.S1
SD3: B40.6 FLEX1.4 R1.1 R2.2
SD4: B1.6 FLEX2.4 R27.1 R28.2
SE3: B40.8 FLEX1.5 R3.1 R4.2
SE4: B1.8 FLEX2.5 R29.1 R30.2
SF3: B40.10 FLEX1.6 R5.1 R6.2
SF4: B1.10 FLEX2.6 R31.1 R32.2
SH3: B40.12 FLEX1.7 R7.1 R8.2
SH4: B1.12 FLEX2.7 R33.1 R34.2
SJ1: B1.14 FLEX2.8 R35.1 R36.2
SJ2: B40.14 FLEX1.8 R9.1 R10.2
SK1: B1.16 FLEX2.9 R37.1 R38.2
SK2: B40.16 FLEX1.9 R11.1 R12.2
SL3: B40.18 FLEX1.10 R13.1 R14.2
SL4: B1.18 FLEX2.10 R39.1 R40.2
SM1: B1.20 FLEX2.11 R41.1 R42.2
SM2: B40.20 FLEX1.11 R15.1 R16.2
SR1: B1.26 FLEX2.14 R43.1 R44.2
SR2: B40.26 FLEX1.14 R17.1 R18.2
SS3: B40.28 FLEX1.15 R19.1 R20.2
SS4: B1.28 FLEX2.15 R45.1 R46.2
ST1: B1.30 FLEX2.16 R47.1 R48.2
ST2: B40.30 FLEX1.16 R21.1 R22.2
SU1: B1.34 FLEX2.17 R49.1 R50.2
SU2: B40.34 FLEX1.17 R23.1 R24.2
SV1: B1.32 FLEX2.18 R51.1 R52.2
SV2: B40.32 FLEX1.18 R25.1 R26.2
T1: D24.C R48.1 U$7.T2
T2: D11.C R22.1 U$2.T2
T3: SV2.30 SV7.NN U$9.T2
T4: SV1.34 SV7.SS SV9.12 U$9.T1
TOP1: R68.2 SV3.1 TOP.1
TOP2: R71.2 SV3.3 TOP.2
TOP3: R72.2 SV3.5 TOP.3
TOP4: R77.2 SV3.7 TOP.4
TOP5: R59.2 SV3.9 TOP.5
TOP6: R66.2 SV3.11 TOP.6
TOP7: R80.2 SV3.13 TOP.7
TOP8: R75.2 SV3.15 TOP.8
TOP9: R99.2 SV4.33 TOP1.18
TOP10: R97.2 SV4.31 TOP1.17
TOP11: R104.2 SV4.29 TOP1.16
TOP12: R62.2 SV3.21 TOP.12
TOP13: R54.2 SV3.23 TOP.13
TOP14: R70.2 SV3.25 TOP.14
TOP15: R55.2 SV3.27 TOP.15
TOP16: R74.2 SV3.29 TOP.16
TOP17: R67.2 SV3.31 TOP.17
TOP18: R69.2 SV3.33 TOP.18
TOP19: R85.2 SV4.27 TOP1.15
TOP20: R100.2 SV4.25 TOP1.14
TOP21: R84.2 SV4.23 TOP1.13
TOP22: R105.2 SV4.15 TOP1.8
TOP23: R110.2 SV4.13 TOP1.7
TOP24: R96.2 SV4.11 TOP1.6
TOP25: R89.2 SV4.9 TOP1.5
TOP26: R107.2 SV4.7 TOP1.4
TOP27: R98.2 SV4.1 TOP1.1
TOP28: R92.2 SV4.21 TOP1.12
TOP29: R101.2 SV4.3 TOP1.2
TOP30: R102.2 SV4.5 TOP1.3
TOP33: R129.2 SV5.33 TOP2.18
TOP35: R127.2 SV5.31 TOP2.17
TOP38: R134.2 SV5.29 TOP2.16
TOP39: R115.2 SV5.27 TOP2.15
TOP41: R130.2 SV5.25 TOP2.14
TOP42: R114.2 SV5.23 TOP2.13
TOP43: R135.2 SV5.15 TOP2.8
TOP45: R140.2 SV5.13 TOP2.7
TOP46: R126.2 SV5.11 TOP2.6
TOP47: R119.2 SV5.9 TOP2.5
TOP48: R137.2 SV5.7 TOP2.4
TOP49: R128.2 SV5.1 TOP2.1
TOP50: R122.2 SV5.21 TOP2.12
TOP51: R131.2 SV5.3 TOP2.2
TOP52: R132.2 SV5.5 TOP2.3
U1: D25.C R50.1 U$7.U2
U2: D12.C R24.1 U$2.U2
U3: U1.1 U$9.U1
U4: SV2.34 SV8.16 U$9.U2
V1: D26.C R52.1 U$7.V2
V2: D13.C R26.1 U$2.V2
V3: SV2.32 SV7.TT U$9.V2
V4: U$9.V1 V1.1
VCC2 [supply]: R1.2 R3.2 R5.2 R7.2 R9.2 R11.2 R13.2 R15.2 R17.2 R19.2 R21.2 R23.2 R25.2 U$2.A2
VCC3 [supply]: EDGE.A2 IC1.14 IC2.14 IC3.14 IC4.14 IC5.14 IC6.14 IC7.14 IC8.12 IC8.13 IC8.14
VCC4 [supply]: R27.2 R29.2 R31.2 R33.2 R35.2 R37.2 R39.2 R41.2 R43.2 R45.2 R47.2 R49.2 R51.2 U$7.A2
VCC6: A2.1 U$9.A2
VCC7 [supply]: EDGE1.A2 IC9.14 IC10.14 IC11.14 IC12.14 IC13.14 IC14.14 IC15.14 IC16.12 IC16.13 IC16.14
VCC8 [supply]: EDGE2.A2 IC17.14 IC18.14 IC19.14 IC20.14 IC21.14 IC22.14 IC23.14 IC24.12 IC24.13 IC24.14

## Tracks (layer width: path | path; a pad name or v marks a point on that pad's centre or on a via)
-15V
  Top 0.813: B40.4 94.61,12.7 93.34,11.43 93.34,9.53 94.61,8.26 104.14,8.26 104.14,17.14 104.78,17.78 105.41,17.78 FLEX1.2
  Bottom 0.813: B40.4 94.61,12.7 64.14,12.7 58.42,7.62 12.7,7.62 U$2.B2
-15V1
  Top 0.813: B1.4 94.61,76.2 93.34,74.93 93.34,73.03 94.61,71.75 104.14,71.75 104.14,80.64 104.78,81.28 105.41,81.28 FLEX2.2
  Bottom 0.813: B1.4 94.61,76.2 64.14,76.2 58.42,71.12 12.7,71.12 U$7.B2
-15V2  (via drill 0.61)
  Top 0.381: v207.01,55.24 213.36,55.24 214,55.88 217.81,55.88 219.07,54.61 233.68,54.61 234.31,55.24 v236.85,55.24
  Bottom 0.381: v207.01,55.24 195.58,55.24 188.59,48.26 184.78,48.26 B2.1 | v236.85,55.24 238.76,55.24 U$9.B2
A1  (via drill 0.61)
  Top 0.381: v219.71,57.15 236.85,57.15 238.12,58.42 238.76,58.42 U$9.A1
  Bottom 0.381: 188.59,46.99 187.32,46.99 178.44,38.1 174.62,38.1 173.35,39.37 167,39.37 SV1.10 | 188.59,46.99 189.87,45.72 SV9.2 | 216.53,57.15 218.44,55.24 218.44,53.98 217.81,53.34 216.53,53.34 215.26,52.07 SV7.C | 216.53,57.15 210.82,57.15 205.74,52.07 193.68,52.07 188.59,46.99 | 216.53,57.15 v219.71,57.15
B1  (via drill 0.61)
  Top 0.381: v219.71,55.88 219.07,55.88 217.17,57.78 195.58,57.78 182.25,44.45 167,44.45 SV1.6 | U$9.B1 238.76,54.61 238.12,54.61 237.49,53.98 234.31,53.98 232.41,52.07 217.81,52.07 SV7.D
  Bottom 0.381: v219.71,55.88 219.71,53.98 217.81,52.07 SV7.D
BOT1  (via drill 0.81)
  Top 0.406: SV3.2 v99.06,175.26
  Bottom 0.406: R73.2 86.04,175.58 81.92,175.58 80.01,177.48 80.01,180.66 85.09,180.66 86.04,181.61 92.71,181.61 SV3.2 | BOT.1 104.46,175.26 v99.06,175.26
BOT2
  Bottom 0.406: R65.2 82.55,176.53 92.71,176.53 | SV3.4 92.71,176.53 | BOT.2 107.31,172.09 108.58,172.09 108.9,172.4 108.9,176.53 92.71,176.53
BOT3
  Bottom 0.406: R60.2 109.86,177.16 109.86,170.18 107,170.18 BOT.3 99.38,169.86 SV3.6
BOT4  (via drill 0.81)
  Top 0.406: R78.2 110.49,179.07 v110.49,169.23
  Bottom 0.406: v110.49,169.23 109.54,168.28 BOT.4 98.42,168.28 SV3.8
BOT5
  Bottom 0.406: R53.2 111.76,180.34 111.76,166.69 BOT.5 97.47,166.69 SV3.10
BOT6
  Bottom 0.406: R61.2 87.63,168.91 92.71,168.91 SV3.12 95.89,165.74 106.05,165.74 BOT.6
BOT7  (via drill 0.81)
  Top 0.406: v158.75,179.07 157.48,177.8 157.48,168.28 158.75,167 SV4.26
  Bottom 0.406: v158.75,179.07 R111.2 | BOT1.15 146.69,166.05 158.43,166.05 SV4.26
BOT8
  Bottom 0.406: R90.2 142.88,139.06 142.88,146.05 145.73,146.05 BOT1.3 153.35,146.37 SV4.6
BOT9
  Bottom 0.406: R56.2 82.55,163.83 92.71,163.83 SV3.14 94.93,165.1 99.06,160.97 106.05,160.97 BOT.9
BOT10  (via drill 0.81)
  Top 0.406: SV4.2 v153.67,140.97
  Bottom 0.406: R103.2 166.69,140.65 170.81,140.65 172.72,138.75 172.72,135.57 167.64,135.57 166.69,134.62 160.02,134.62 SV4.2 | BOT1.1 148.27,140.97 v153.67,140.97
BOT11  (via drill 0.81)
  Top 0.406: R82.2 90.17,157.48 90.17,160.66 90.81,161.29 93.98,161.29 93.98,161.93 | 93.98,161.93 SV3.16 93.98,161.93 | 93.98,161.93 v98.11,157.8
  Bottom 0.406: BOT.11 106.05,157.8 v98.11,157.8
BOT12
  Bottom 0.406: R63.2 87.63,156.21 92.71,156.21 93.34,155.57 | SV3.22 93.34,155.57 | 93.34,155.57 BOT.12
BOT13
  Bottom 0.406: R95.2 170.18,139.7 160.02,139.7 | SV4.4 160.02,139.7 | BOT1.2 145.41,144.15 144.15,144.15 143.83,143.83 143.83,139.7 160.02,139.7
BOT14
  Bottom 0.406: R79.2 85.09,151.13 92.71,151.13 SV3.24 BOT.14
BOT15  (via drill 0.81)
  Top 0.406: v93.98,137.16 95.25,138.43 95.25,147.96 93.98,149.22 SV3.26
  Bottom 0.406: v93.98,137.16 R81.2 | BOT.15 106.05,150.18 94.3,150.18 SV3.26
BOT16
  Bottom 0.406: R64.2 113.35,136.21 113.35,149.22 BOT.16 105.41,149.22 103.82,147.64 94.3,147.64 SV3.28
BOT17
  Bottom 0.406: R58.2 111.44,136.84 111.44,147.64 BOT.17 105.41,147.64 102.87,145.1 94.3,145.1 SV3.30
BOT18
  Bottom 0.406: R57.2 110.49,138.43 110.49,146.05 BOT.18 105.41,146.05 101.6,142.24 SV3.32
BOT19
  Bottom 0.406: 109.22,141.29 109.22,144.46 BOT.19 | 109.22,141.29 R76.2 | SV3.34 95.57,141.29 109.22,141.29
BOT20  (via drill 0.81)
  Top 0.406: R108.2 142.24,137.16 v142.24,147
  Bottom 0.406: v142.24,147 143.19,147.96 BOT1.4 154.31,147.96 SV4.8
BOT21
  Bottom 0.406: R83.2 140.97,135.89 140.97,149.54 BOT1.5 155.26,149.54 SV4.10
BOT22
  Bottom 0.406: 143.51,174.94 143.51,171.77 BOT1.19 | 143.51,174.94 R106.2 | SV4.34 157.16,174.94 143.51,174.94
BOT23
  Bottom 0.406: R87.2 142.24,177.8 142.24,170.18 BOT1.18 147.32,170.18 151.13,173.99 SV4.32
BOT24
  Bottom 0.406: R88.2 141.29,179.39 141.29,168.59 BOT1.17 147.32,168.59 149.86,171.13 158.43,171.13 SV4.30
BOT25
  Bottom 0.406: R94.2 139.38,180.02 139.38,167 BOT1.16 147.32,167 148.91,168.59 158.43,168.59 SV4.28
BOT26
  Bottom 0.406: R109.2 167.64,165.1 160.02,165.1 SV4.24 BOT1.14
BOT27
  Bottom 0.406: R93.2 165.1,160.02 160.02,160.02 159.38,160.66 | SV4.22 159.38,160.66 | 159.38,160.66 BOT1.12
BOT28  (via drill 0.81)
  Top 0.406: R112.2 162.56,158.75 162.56,155.57 161.93,154.94 158.75,154.94 158.75,154.31 | 158.75,154.31 SV4.16 158.75,154.31 | 158.75,154.31 v154.62,158.43
  Bottom 0.406: BOT1.11 146.69,158.43 v154.62,158.43
BOT29
  Bottom 0.406: R86.2 170.18,152.4 160.02,152.4 SV4.14 157.8,151.13 153.67,155.26 146.69,155.26 BOT1.9
BOT30
  Bottom 0.406: R91.2 165.1,147.32 160.02,147.32 SV4.12 156.84,150.5 146.69,150.5 BOT1.6
BOT31  (via drill 0.81)
  Top 0.406: v158.75,115.57 157.48,114.3 157.48,104.78 158.75,103.5 SV5.26
  Bottom 0.406: v158.75,115.57 R141.2 | BOT2.15 146.69,102.55 158.43,102.55 SV5.26
BOT32
  Bottom 0.406: R120.2 142.88,75.56 142.88,82.55 145.73,82.55 BOT2.3 153.35,82.87 SV5.6
BOT33  (via drill 0.81)
  Top 0.406: SV5.2 v153.67,77.47
  Bottom 0.406: R133.2 166.69,77.15 170.81,77.15 172.72,75.25 172.72,72.07 167.64,72.07 166.69,71.12 160.02,71.12 SV5.2 | BOT2.1 148.27,77.47 v153.67,77.47
BOT34
  Bottom 0.406: R125.2 170.18,76.2 160.02,76.2 | SV5.4 160.02,76.2 | BOT2.2 145.41,80.64 144.15,80.64 143.83,80.33 143.83,76.2 160.02,76.2
BOT35  (via drill 0.81)
  Top 0.406: R138.2 142.24,73.66 v142.24,83.5
  Bottom 0.406: v142.24,83.5 143.19,84.45 BOT2.4 154.31,84.45 SV5.8
BOT36
  Bottom 0.406: R113.2 140.97,72.39 140.97,86.04 BOT2.5 155.26,86.04 SV5.10
BOT37
  Bottom 0.406: 143.51,111.44 143.51,108.27 BOT2.19 | 143.51,111.44 R136.2 | SV5.34 157.16,111.44 143.51,111.44
BOT38
  Bottom 0.406: R117.2 142.24,114.3 142.24,106.68 BOT2.18 147.32,106.68 151.13,110.49 SV5.32
BOT39
  Bottom 0.406: R118.2 141.29,115.89 141.29,105.09 BOT2.17 147.32,105.09 149.86,107.63 158.43,107.63 SV5.30
BOT40
  Bottom 0.406: R124.2 139.38,116.52 139.38,103.5 BOT2.16 147.32,103.5 148.91,105.09 158.43,105.09 SV5.28
BOT41
  Bottom 0.406: R139.2 167.64,101.6 160.02,101.6 SV5.24 BOT2.14
BOT42
  Bottom 0.406: R123.2 165.1,96.52 160.02,96.52 159.38,97.16 | SV5.22 159.38,97.16 | 159.38,97.16 BOT2.12
BOT43  (via drill 0.81)
  Top 0.406: R142.2 162.56,95.25 162.56,92.08 161.93,91.44 158.75,91.44 158.75,90.81 | 158.75,90.81 SV5.16 158.75,90.81 | 158.75,90.81 v154.62,94.93
  Bottom 0.406: BOT2.11 146.69,94.93 v154.62,94.93
BOT44
  Bottom 0.406: R116.2 170.18,88.9 160.02,88.9 SV5.14 157.8,87.63 153.67,91.76 146.69,91.76 BOT2.9
BOT45
  Bottom 0.406: R121.2 165.1,83.82 160.02,83.82 SV5.12 156.84,87 146.69,87 BOT2.6
C1
  Top 0.381: SV1.33 163.83,9.53 163.83,10.79 SV1.31 163.83,12.06 163.83,13.34 SV1.29 163.83,14.61 163.83,15.88 SV1.27 163.83,17.14 163.83,18.41 SV1.25 163.83,19.68 163.83,20.95 SV1.23 163.83,22.23 163.83,23.5 SV1.21 163.83,24.77 163.83,26.04 SV1.19 163.83,27.3 163.83,28.57 SV1.17 163.83,29.84 163.83,31.11 SV1.15 163.83,32.38 163.83,33.66 SV1.13 163.83,34.92 163.83,36.2 SV1.11 163.83,37.47 163.83,38.73 SV1.9 163.83,40.01 163.83,41.27 SV1.7 163.83,42.55 163.83,43.81 SV1.5 163.83,45.09 163.83,46.35 SV1.3 163.83,47.62 163.83,48.9 SV1.1 | 214.63,38.1 214.63,38.73 SV7.P | 214.63,38.1 214.63,37.47 SV7.S | C1.1 186.06,27.94 187.32,27.94 SV9.15 187.96,28.57 187.96,29.84 SV9.13 187.96,31.11 187.96,32.38 SV9.11 187.96,33.66 187.96,34.92 SV9.9 187.96,36.2 187.96,37.47 SV9.7 187.96,38.73 187.96,40.01 SV9.5 187.96,41.27 187.96,42.55 SV9.3 187.96,43.81 187.96,45.09 SV9.1 | 214.63,38.1 217.81,38.1 230.5,50.8 237.49,50.8 238.76,52.07 U$9.C1
  Bottom 0.381: SV7.S 214,36.83 189.87,36.83 188.59,35.56 SV9.9 | SV1.15 164.47,31.75 165.74,30.48 177.16,30.48 187.32,40.64 SV9.5
  pour Top: 127,0 238.76,0 238.76,62.23 127,62.23
C2  (via drill 0.61)
  Top 0.381: SV8.15 187.96,8.26 187.96,9.53 SV8.13 187.96,10.79 187.96,12.06 SV8.11 187.96,13.34 187.96,14.61 SV8.9 187.96,15.88 187.96,17.14 SV8.7 | C2.1 186.06,25.4 187.32,25.4 SV8.1 187.96,24.77 187.96,23.5 SV8.3 187.96,22.23 187.96,20.95 SV8.5 188.59,20.32 189.87,19.05 200.66,19.05 | SV2.33 200.66,10.79 200.66,12.06 SV2.31 200.66,13.34 200.66,14.61 SV2.29 200.66,15.88 200.66,17.14 SV2.27 200.66,18.41 200.66,19.05 | 200.66,19.05 200.66,19.68 SV2.25 200.66,20.95 200.66,22.23 SV2.23 200.66,23.5 200.66,24.77 SV2.21 200.66,26.04 200.66,27.3 SV2.19 200.66,28.57 200.66,29.84 SV2.17 200.66,31.11 200.66,32.38 SV2.15 200.66,33.66 200.66,34.92 SV2.13 200.66,36.2 200.66,37.47 SV2.11 | SV2.9 200.66,41.27 200.66,42.55 SV2.7 200.66,43.81 200.66,45.09 SV2.5 200.66,46.35 200.66,47.62 SV2.3 | SV2.1 200.66,50.16 200.66,48.9 SV2.3 | v212.72,49.53 202.56,49.53 201.29,48.26 SV2.3
  Bottom 0.381: SV8.5 187.96,19.68 187.96,18.41 SV8.7 | SV2.9 200.66,40.01 200.66,38.73 SV2.11 | v212.72,49.53 214,48.26 215.26,48.26 215.9,48.9 215.9,50.16 216.53,50.8 237.49,50.8 238.76,52.07 U$9.C2
  pour Bottom (isolate 0.254): 127,0 238.76,0 238.76,62.23 127,62.23
D1
  Top 0.406: D14.C 38.1,73.66 40.01,73.66 R28.1
  Bottom 0.406: D14.C 35.56,73.66 33.02,76.2 15.24,76.2 13.97,77.47 U$7.D2
D2
  Top 0.406: D1.C 38.1,10.16 40.01,10.16 R2.1
  Bottom 0.406: D1.C 35.56,10.16 33.02,12.7 15.24,12.7 13.97,13.97 U$2.D2
D3
  Top 0.381: SV2.6 203.84,45.72 211.46,45.72 214,48.26 215.26,48.26 216.53,49.53 SV7.F
  Bottom 0.381: SV7.F 217.81,49.53 237.49,49.53 238.76,48.26 U$9.D2
D4  (via drill 0.61)
  Top 0.381: SV1.8 167,41.91 180.97,41.91 192.41,53.34 205.74,53.34 208.28,50.8 217.81,50.8 218.44,50.16 218.44,48.9 217.17,47.62 SV7.J | v229.87,48.26 238.76,48.26 U$9.D1
  Bottom 0.381: v229.87,48.26 219.07,48.26 217.81,46.99 SV7.J
E1
  Top 0.406: D15.C 38.1,77.47 40.01,77.47 R30.1
  Bottom 0.406: D15.C 35.56,77.47 33.66,79.38 15.88,79.38 15.24,80.01 13.97,80.01 U$7.E2
E2
  Top 0.406: D2.C 38.1,13.97 40.01,13.97 R4.1
  Bottom 0.406: D2.C 35.56,13.97 33.66,15.88 15.88,15.88 15.24,16.51 13.97,16.51 U$2.E2
E3  (via drill 0.61)
  Top 0.381: v210.82,43.18 215.26,43.18 216.53,44.45 SV7.L 217.81,44.45 v220.34,46.99
  Bottom 0.381: v210.82,43.18 203.84,43.18 SV2.8 | v220.34,46.99 236.85,46.99 237.49,46.35 238.12,45.72 238.76,45.72 U$9.E2
E4  (via drill 0.61)
  Top 0.381: v193.04,46.99 187.32,46.99 180.97,40.64 177.16,40.64 173.35,36.83 167,36.83 SV1.12 | v226.06,44.45 237.49,44.45 238.76,45.72 U$9.E1
  Bottom 0.381: v193.04,46.99 210.19,46.99 214,43.18 215.26,43.18 216.53,41.91 SV7.N 217.81,41.91 220.34,44.45 v226.06,44.45
F1
  Top 0.406: D16.C 38.1,81.28 40.01,81.28 R32.1
  Bottom 0.406: D16.C 35.56,81.28 34.29,82.55 15.24,82.55 13.97,83.82 U$7.F2
F2
  Top 0.406: D3.C 38.1,17.78 40.01,17.78 R6.1
  Bottom 0.406: D3.C 35.56,17.78 34.29,19.05 15.24,19.05 13.97,20.32 U$2.F2
F3
  Top 0.381: SV7.H 214.63,46.35 214.63,45.09 SV7.K 214,44.45 207.65,44.45 203.84,40.64 SV2.10 202.56,40.64 201.29,39.37 200.03,39.37 199.39,38.73 199.39,29.84 190.5,20.95 SV8.6
  Bottom 0.381: U$9.F2 238.76,41.91 237.49,43.18 229.24,43.18 226.69,45.72 216.53,45.72 215.26,46.99 SV7.H
F4  (via drill 0.61)
  Top 0.381: U$9.F1 238.76,42.55 231.78,35.56 216.53,35.56 215.26,34.29 SV7.U 214,34.29 210.82,37.47 210.82,38.1 v209.55,39.37
  Bottom 0.381: SV1.14 167,34.29 179.71,34.29 187.32,41.91 188.59,41.91 189.87,43.18 SV9.4 191.13,43.18 198.75,43.18 200.03,41.91 207.01,41.91 v209.55,39.37
GND2  (via drill 0.81)
  Top 0.762: IC1.7 23.81,141.29 23.81,152.72 25.4,154.31 IC3.7 25.4,155.26 23.18,157.48 23.18,167.64 25.4,169.86 IC5.7 23.81,171.77 23.81,181.29 IC7.7 | EDGE.T1 15.56,178.75 v15.56,180.02 | SV3.18 91.76,160.02 SV3.17 SV3.19 91.76,157.48 SV3.20 93.98,157.16 95.57,155.57 95.57,154.94 v96.2,154.31 | IC2.7 46.67,141.29 46.67,153.35 | IC4.7 46.67,153.35 | 46.83,168.75 46.67,168.59 46.67,159.07 | 46.83,168.75 IC6.7 | 46.67,159.07 46.67,153.67 46.67,153.35 | IC8.7 46.67,181.29 46.67,178.75 | 46.67,178.75 46.67,168.91 46.83,168.75 | v46.99,159.07 46.67,159.07 | IC7.4 37.15,178.75 46.35,178.75 46.67,178.75
  Bottom 0.762: IC7.4 IC7.5 30.16,182.88 28.57,181.29 26.99,181.29 IC7.7 25.08,182.88 18.41,182.88 v15.56,180.02 | EDGE.C2 8.57,138.11 23.5,138.11 25.08,139.7 IC1.7 | BOT.13 106.36,154.31 v96.2,154.31 | SV3.19 83.19,157.48 79.06,161.61 75.88,161.61 73.34,159.07 v46.99,159.07
GND3  (via drill 0.81)
  Top 0.762: IC9.7 228.92,174.94 228.92,163.51 227.33,161.93 IC11.7 227.33,160.97 229.55,158.75 229.55,148.59 227.33,146.37 IC13.7 228.92,144.46 228.92,134.94 IC15.7 | EDGE1.T1 237.17,137.48 v237.17,136.21 | SV4.18 160.97,156.21 SV4.17 SV4.19 160.97,158.75 SV4.20 158.75,159.07 157.16,160.66 157.16,161.29 v156.53,161.93 | IC10.7 206.06,174.94 206.06,162.88 | IC12.7 206.06,162.88 | 205.9,147.48 206.06,147.64 206.06,157.16 | 205.9,147.48 IC14.7 | 206.06,157.16 206.06,162.56 206.06,162.88 | IC16.7 206.06,134.94 206.06,137.48 | 206.06,137.48 206.06,147.32 205.9,147.48 | v205.74,157.16 206.06,157.16 | IC15.4 215.58,137.48 206.38,137.48 206.06,137.48
  Bottom 0.762: IC15.4 IC15.5 222.57,133.35 224.16,134.94 225.74,134.94 IC15.7 227.65,133.35 234.31,133.35 v237.17,136.21 | EDGE1.C2 244.16,178.12 229.24,178.12 227.65,176.53 IC9.7 | BOT1.13 146.37,161.93 v156.53,161.93 | SV4.19 169.54,158.75 173.67,154.62 176.85,154.62 179.39,157.16 v205.74,157.16
GND4  (via drill 0.81)
  Top 0.762: IC17.7 228.92,111.44 228.92,100.01 227.33,98.42 IC19.7 227.33,97.47 229.55,95.25 229.55,85.09 227.33,82.87 IC21.7 228.92,80.96 228.92,71.44 IC23.7 | EDGE2.T1 237.17,73.98 v237.17,72.71 | SV5.18 160.97,92.71 SV5.17 SV5.19 160.97,95.25 SV5.20 158.75,95.57 157.16,97.16 157.16,97.79 v156.53,98.42 | IC18.7 206.06,111.44 206.06,99.38 | IC20.7 206.06,99.38 | 205.9,83.98 206.06,84.14 206.06,93.66 | 205.9,83.98 IC22.7 | 206.06,93.66 206.06,99.06 206.06,99.38 | IC24.7 206.06,71.44 206.06,73.98 | 206.06,73.98 206.06,83.82 205.9,83.98 | v205.74,93.66 206.06,93.66 | IC23.4 215.58,73.98 206.38,73.98 206.06,73.98
  Bottom 0.762: IC23.4 IC23.5 222.57,69.85 224.16,71.44 225.74,71.44 IC23.7 227.65,69.85 234.31,69.85 v237.17,72.71 | EDGE2.C2 244.16,114.62 229.24,114.62 227.65,113.03 IC17.7 | BOT2.13 146.37,98.42 v156.53,98.42 | SV5.19 169.54,95.25 173.67,91.12 176.85,91.12 179.39,93.66 v205.74,93.66
GND5
  Top 0.813: D1.A 26.04,10.79 26.04,13.34 D2.A 26.04,14.61 26.04,17.14 D3.A 26.04,18.41 26.04,20.95 D4.A 26.04,22.23 26.04,24.77 D5.A 26.04,26.04 26.04,28.57 D6.A 26.04,29.84 26.04,32.38 D7.A 26.04,33.66 26.04,36.2 D8.A 26.04,37.47 26.04,40.01 D9.A 26.04,41.27 26.04,43.81 D10.A 26.04,45.09 26.04,47.62 D11.A 26.04,48.9 26.04,51.44 D12.A 26.04,52.7 26.04,55.24 D13.A | FLEX1.3 107.95,19.37 110.49,19.37 110.49,46.35 106.05,50.8 98.42,50.8 B40.33
  Bottom 0.813: B40.1 97.79,10.79 97.79,12.06 B40.3 97.79,13.34 97.79,13.97 97.79,14.61 B40.5 97.79,15.88 97.79,17.14 B40.7 97.79,18.41 97.79,19.68 B40.9 97.79,20.95 97.79,22.23 B40.11 97.79,23.5 97.79,24.77 B40.13 97.79,26.04 97.79,27.3 B40.15 97.79,28.57 97.79,29.84 B40.17 97.79,31.11 97.79,32.38 B40.19 97.79,33.66 97.79,34.92 B40.21 97.79,36.2 97.79,37.47 B40.23 97.79,38.73 97.79,40.01 B40.25 97.79,41.27 97.79,42.55 B40.27 97.79,43.81 97.79,45.09 B40.29 97.79,46.35 97.79,47.62 B40.31 97.79,48.9 97.79,50.16 B40.33 97.79,51.44 90.81,58.42 30.48,58.42 27.94,55.88 D13.A | U$2.C2 13.97,10.16 25.4,10.16 D1.A
GND6
  Top 0.813: D14.A 26.04,74.3 26.04,76.83 D15.A 26.04,78.11 26.04,80.64 D16.A 26.04,81.92 26.04,84.45 D17.A 26.04,85.72 26.04,88.27 D18.A 26.04,89.53 26.04,92.08 D19.A 26.04,93.34 26.04,95.89 D20.A 26.04,97.16 26.04,99.69 D21.A 26.04,100.97 26.04,103.5 D22.A 26.04,104.78 26.04,107.31 D23.A 26.04,108.58 26.04,111.12 D24.A 26.04,112.39 26.04,114.94 D25.A 26.04,116.2 26.04,118.75 D26.A | FLEX2.3 107.95,82.87 110.49,82.87 110.49,109.86 106.05,114.3 98.42,114.3 B1.33
  Bottom 0.813: B1.1 97.79,74.3 97.79,75.56 B1.3 97.79,76.83 97.79,77.47 97.79,78.11 B1.5 97.79,79.38 97.79,80.64 B1.7 97.79,81.92 97.79,83.19 B1.9 97.79,84.45 97.79,85.72 B1.11 97.79,87 97.79,88.27 B1.13 97.79,89.53 97.79,90.81 B1.15 97.79,92.08 97.79,93.34 B1.17 97.79,94.61 97.79,95.89 B1.19 97.79,97.16 97.79,98.42 B1.21 97.79,99.69 97.79,100.97 B1.23 97.79,102.23 97.79,103.5 B1.25 97.79,104.78 97.79,106.05 B1.27 97.79,107.31 97.79,108.58 B1.29 97.79,109.86 97.79,111.12 B1.31 97.79,112.39 97.79,113.67 B1.33 97.79,114.94 90.81,121.92 30.48,121.92 27.94,119.38 D26.A | U$7.C2 13.97,73.66 25.4,73.66 D14.A
H1
  Top 0.406: D17.C 38.1,85.09 40.01,85.09 R34.1
  Bottom 0.406: D17.C 35.56,85.09 34.29,86.36 13.97,86.36 U$7.H2
H2
  Top 0.406: D4.C 38.1,21.59 40.01,21.59 R8.1
  Bottom 0.406: D4.C 35.56,21.59 34.29,22.86 13.97,22.86 U$2.H2
H3
  Bottom 0.381: SV2.12 203.84,38.1 215.26,38.1 216.53,39.37 SV7.R 217.81,39.37 238.76,39.37 U$9.H2
H4  (via drill 0.61)
  Top 0.381: v212.09,39.37 212.09,37.47 214,35.56 215.26,35.56 216.53,36.83 SV7.T 217.81,36.83 v231.14,36.83 | v233.68,35.56 236.22,38.1 237.49,38.1 238.76,39.37 U$9.H1
  Bottom 0.381: v212.09,39.37 212.09,43.81 211.46,44.45 187.32,44.45 178.44,35.56 165.74,35.56 165.1,34.92 165.1,33.66 166.37,32.38 SV1.16 | v233.68,35.56 232.41,35.56 v231.14,36.83
J1
  Top 0.406: D18.C 38.1,88.9 40.01,88.9 R36.1
  Bottom 0.406: D18.C 35.56,88.9 34.29,90.17 13.97,90.17 U$7.J2
J2
  Top 0.406: D5.C 38.1,25.4 40.01,25.4 R10.1
  Bottom 0.406: D5.C 35.56,25.4 34.29,26.67 13.97,26.67 U$2.J2
J3  (via drill 0.61)
  Top 0.381: v208.91,15.24 214,20.32 v219.71,20.32 | v219.71,26.67 219.71,27.94 v222.25,30.48 | U$9.J1 239.4,35.56 235.59,35.56 233.04,33.02 219.07,33.02 217.81,31.75 SV7.X
  Bottom 0.381: v208.91,15.24 208.91,10.79 201.93,3.81 188.59,3.81 174.62,17.78 165.74,17.78 165.1,18.41 165.1,24.77 166.37,26.04 SV1.20 | v219.71,26.67 v219.71,20.32 | v222.25,30.48 219.07,30.48 217.81,31.75 SV7.X
J4
  Top 0.381: SV7.M 214,41.91 210.19,41.91 203.84,35.56 SV2.14
  Bottom 0.381: SV8.8 191.13,17.78 196.85,23.5 196.85,31.11 200.03,34.29 201.29,34.29 202.56,35.56 SV2.14 203.84,35.56 217.81,35.56 220.34,38.1 231.78,38.1 233.04,36.83 237.49,36.83 238.76,35.56 U$9.J2
JA2
  Top 0.381: SV8.2 191.13,25.4 193.68,25.4 196.85,28.57 196.85,47.62 194.31,50.16 PAD1.1 194.94,50.8 196.22,52.07 201.29,52.07 202.56,50.8 SV2.2
  Bottom 0.381: SV7.B 216.53,54.61 215.26,55.88 210.82,55.88 205.74,50.8 203.84,50.8 SV2.2
JB2
  Top 0.381: SV8.4 190.5,23.5 189.23,24.77 189.23,26.04 189.87,26.67 193.68,26.67 195.58,28.57 195.58,46.35 194.31,47.62 PAD2.1
  Bottom 0.381: SV7.A 214,54.61 207.65,48.26 203.84,48.26 SV2.4 202.56,48.26 201.29,49.53 196.22,49.53 194.94,48.26 PAD2.1
JU1  (via drill 0.61)
  Top 0.381: v185.42,31.75 v177.8,39.37 | v189.23,6.35 214,6.35 SV7.UU
  Bottom 0.381: v177.8,39.37 174.62,39.37 167,46.99 SV1.4 165.74,46.99 164.47,48.26 158.12,48.26 PAD3.1 | SV9.14 189.87,30.48 188.59,31.75 v185.42,31.75 182.88,29.21 182.88,13.34 187.32,8.89 188.59,8.89 189.23,8.26 v189.23,6.35
JV1  (via drill 0.61)
  Top 0.381: PAD4.1 155.57,48.26 158.12,50.8 164.47,50.8 165.74,49.53 SV1.2 166.37,48.9 165.1,47.62 165.1,26.04 165.74,25.4 v179.07,25.4 | v189.23,13.97 194.94,13.97 200.03,8.89 201.29,8.89 201.93,9.53 201.93,10.79 202.56,11.43 204.47,11.43 207.01,8.89 212.72,8.89 214,7.62 215.26,7.62 216.53,6.35 SV7.VV | v181.61,22.86 185.42,22.86 v186.69,21.59
  Bottom 0.381: 189.23,21.59 v189.23,13.97 | 189.23,21.59 189.23,26.04 190.5,27.3 SV9.16 | v179.07,25.4 v181.61,22.86 | v186.69,21.59 189.23,21.59
K1
  Top 0.406: D19.C 38.1,92.71 40.01,92.71 R38.1
  Bottom 0.406: D19.C 35.56,92.71 34.29,93.98 15.24,93.98 13.97,92.71 U$7.K2
K2
  Top 0.406: D6.C 38.1,29.21 40.01,29.21 R12.1
  Bottom 0.406: D6.C 35.56,29.21 34.29,30.48 15.24,30.48 13.97,29.21 U$2.K2
K3
  Top 0.381: SV2.16 203.84,33.02 215.26,33.02 216.53,34.29 SV7.V
  Bottom 0.381: SV7.V 217.81,34.29 236.85,34.29 237.49,33.66 238.12,33.02 238.76,33.02 U$9.K2
K4  (via drill 0.61)
  Top 0.381: SV7.AA 214.63,27.3 214.63,28.57 SV7.Y 215.26,29.21 216.53,30.48 220.34,30.48 221.62,31.75 237.49,31.75 238.76,33.02 U$9.K1 | v198.12,30.48 v198.12,40.64
  Bottom 0.381: SV1.18 167,29.21 177.16,29.21 187.32,39.37 188.59,39.37 189.87,40.64 SV9.6 191.13,40.64 v198.12,40.64 | v198.12,30.48 199.39,31.75 203.84,31.75 204.47,31.11 204.47,29.84 203.84,29.21 202.56,29.21 201.93,28.57 201.93,27.3 202.56,26.67 214,26.67 SV7.AA
L1
  Top 0.406: D20.C 38.1,96.52 40.01,96.52 R40.1
  Bottom 0.406: D20.C 35.56,96.52 34.29,95.25 15.24,95.25 13.97,96.52 U$7.L2
L2
  Top 0.406: D7.C 38.1,33.02 40.01,33.02 R14.1
  Bottom 0.406: D7.C 35.56,33.02 34.29,31.75 15.24,31.75 13.97,33.02 U$2.L2
L3  (via drill 0.61)
  Top 0.381: v175.9,20.32 174.62,21.59 167,21.59 SV1.24 | v207.65,15.24 203.84,19.05 202.56,19.05 201.93,19.68 201.93,23.5 202.56,24.13 206.38,24.13 v210.19,27.94 | v221.62,27.94 222.25,28.57 236.85,28.57 237.49,29.21 238.76,29.21 U$9.L1
  Bottom 0.381: v175.9,20.32 175.9,17.78 188.59,5.08 201.93,5.08 207.65,10.79 v207.65,15.24 | 215.26,27.94 v210.19,27.94 | 215.26,27.94 216.53,26.67 SV7.BB | v221.62,27.94 215.26,27.94
L4
  Top 0.381: SV7.W 214,31.75 205.1,31.75 203.84,30.48 SV2.18
  Bottom 0.381: SV8.10 190.5,15.88 199.39,24.77 199.39,28.57 200.03,29.21 201.29,29.21 202.56,30.48 SV2.18 | U$9.L2 238.76,29.21 237.49,30.48 224.16,30.48 221.62,33.02 216.53,33.02 215.26,31.75 SV7.W
M1
  Top 0.406: D21.C 38.1,100.33 40.01,100.33 R42.1
  Bottom 0.406: D21.C 35.56,100.33 34.29,99.06 13.97,99.06 U$7.M2
M2
  Top 0.406: D8.C 38.1,36.83 40.01,36.83 R16.1
  Bottom 0.406: D8.C 35.56,36.83 34.29,35.56 13.97,35.56 U$2.M2
M3
  Bottom 0.381: SV2.20 203.84,27.94 208.28,27.94 210.82,30.48 215.26,30.48 216.53,29.21 SV7.Z 217.81,29.21 234.95,29.21 237.49,26.67 238.76,26.67 U$9.M2
M4  (via drill 0.61)
  Top 0.381: v199.39,16.51 189.87,16.51 189.23,17.14 189.23,18.41 188.59,19.05 187.32,19.05 186.06,20.32 182.25,20.32 179.71,22.86 165.74,22.86 165.1,22.23 165.1,18.41 166.37,17.14 SV1.28 | v224.79,25.4 236.22,25.4 237.49,25.4 238.76,26.67 U$9.M1 | v220.98,21.59 217.81,21.59 SV7.FF
  Bottom 0.381: v199.39,16.51 201.29,16.51 201.93,17.14 201.93,18.41 202.56,19.05 208.91,19.05 212.72,22.86 215.26,22.86 216.53,21.59 SV7.FF | v224.79,25.4 v220.98,21.59
N1  (via drill 0.61)
  Top 0.381: 189.23,29.21 189.23,36.2 190.5,37.47 SV9.8 | 189.23,29.21 189.23,27.3 188.59,26.67 184.78,26.67 182.25,24.13 167,24.13 SV1.22 | SV7.CC 215.26,24.13 216.53,22.86 238.76,22.86 U$9.N1 | v193.04,29.21 189.23,29.21 | v199.39,21.59 v193.04,21.59
  Bottom 0.381: v193.04,21.59 v193.04,29.21 | v199.39,21.59 210.19,21.59 212.72,24.13 214,24.13 SV7.CC
N2  (via drill 0.61)
  Top 0.381: 211.46,25.4 214.63,22.23 SV7.EE | 211.46,25.4 211.46,28.57 210.82,29.21 207.65,29.21 203.84,25.4 SV2.22 | v233.04,26.67 221.62,26.67 220.34,25.4 211.46,25.4
  Bottom 0.381: SV8.12 190.5,13.34 198.12,20.95 198.12,22.23 200.03,24.13 201.29,24.13 202.56,25.4 SV2.22 | v233.04,26.67 235.59,24.13 237.49,24.13 238.76,22.86 U$9.N2
N$1  (via drill 0.81)
  Top 0.406: IC2.2 60.33,139.06 60.33,136.84 59.37,135.89 53.34,135.89 v53.34,138.11 | v35.56,138.11 31.75,134.3 31.75,131.76 30.8,130.81 23.18,130.81 v23.18,131.44 | v15.56,131.76 7.94,131.76 EDGE.A1
  Bottom 0.406: IC2.1 IC2.2 | v35.56,138.11 v53.34,138.11 | v23.18,131.44 22.86,131.76 v15.56,131.76
N$2  (via drill 0.81)
  Top 0.406: IC2.3 59.05,139.06 v59.05,137.16
  Bottom 0.406: v59.05,137.16 60.33,135.89 97.79,135.89 R58.1
N$3  (via drill 0.81)
  Top 0.406: R57.1 95.25,137.16 95.25,136.84 94.3,135.89 92.71,135.89 92.71,145.41 92.08,146.05 87.63,146.05 87.63,137.48 83.19,133.03 83.19,132.4 80.33,129.54 64.77,129.54 64.77,140.02 61.28,143.51 49.53,143.51 v49.53,148.27 | v39.37,149.22 29.21,149.22 29.21,155.26 28.26,156.21 26.67,156.21 26.67,153.99 25.4,152.72 IC3.8
  Bottom 0.406: v49.53,148.27 48.9,148.91 39.69,148.91 v39.37,149.22
N$4  (via drill 0.81)
  Top 0.406: IC1.8 26.67,133.35 26.67,135.89 v27.94,137.16 | v77.15,133.35 77.47,133.67 77.47,160.34 75.25,162.56 R56.1
  Bottom 0.406: v27.94,137.16 29.53,135.57 47.62,135.57 47.94,135.89 59.05,135.89 60.64,134.3 74.93,134.3 75.88,133.35 v77.15,133.35
N$5  (via drill 0.81)
  Top 0.406: v48.26,150.18 IC4.8
  Bottom 0.406: v48.26,150.18 49.53,151.45 70.48,151.45 72.07,149.86 R55.1
N$6  (via drill 0.81)
  Top 0.406: v33.02,158.43 IC5.11 | v66.36,157.8 71.12,153.03 R54.1
  Bottom 0.406: v33.02,158.43 33.66,157.8 v66.36,157.8
N$7  (via drill 0.81)
  Top 0.406: IC1.10 IC1.9 v27.94,135.57 | v25.4,138.11 21.91,141.6 v21.91,147.96
  Bottom 0.406: v25.4,138.11 v27.94,135.57 | v21.91,147.96 20,149.86 8.26,149.86 EDGE.H2
N$8  (via drill 0.81)